# Altium PCB PCB12.PcbDoc
Units mm, origin at the board's own origin, x right, y up, seen from the top; angles counter-clockwise.
Board outline 36.2 x 38.61 mm, 2 copper layers (Top Layer, Bottom Layer); 10 components, 6 nets, 27 pads, 0 vias.
Unrouted connection lines stored in the file: 1.
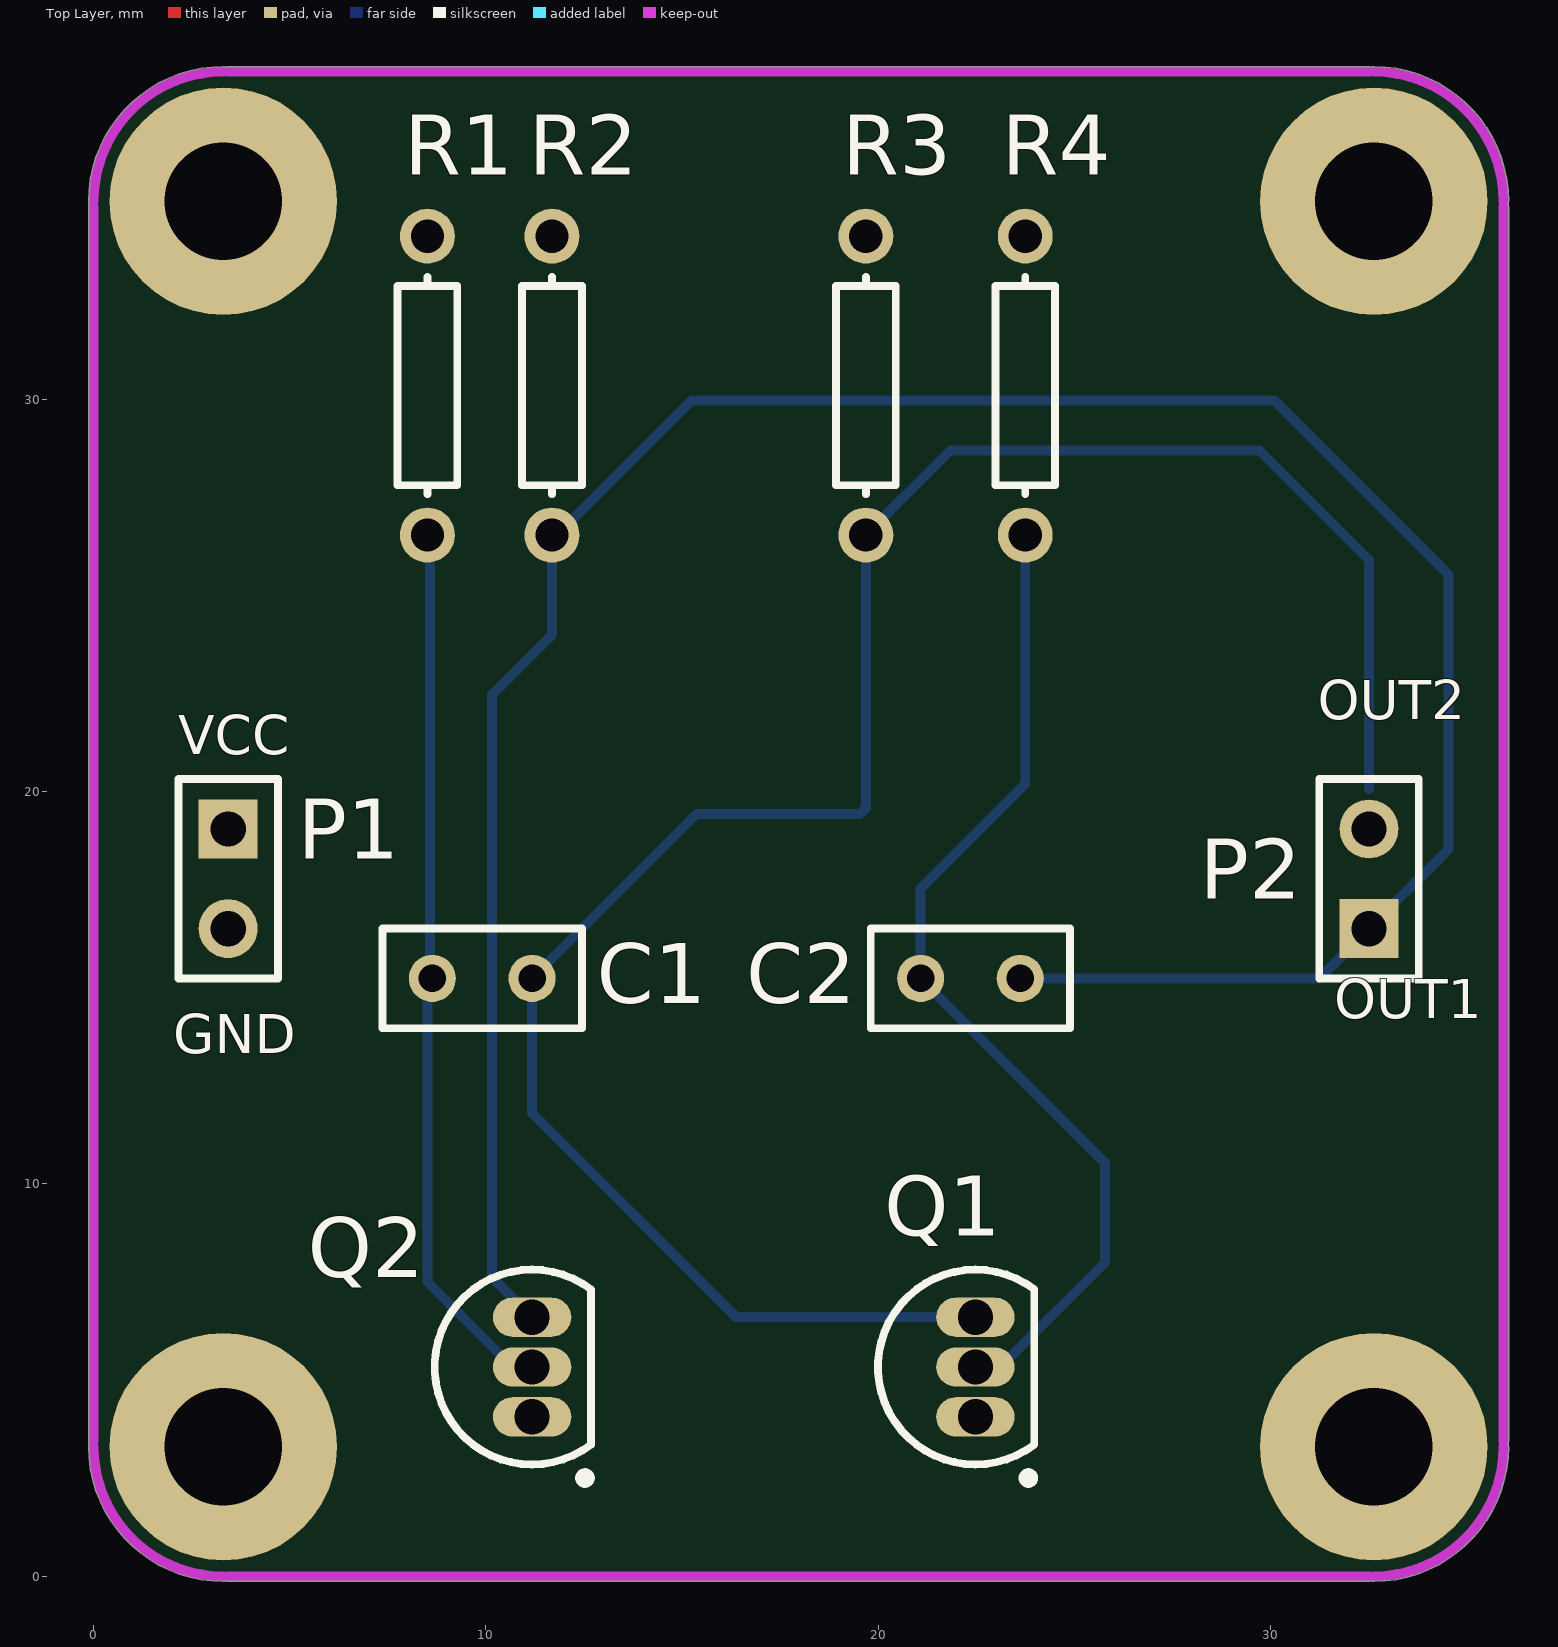
[diagram p0: Top Layer view]
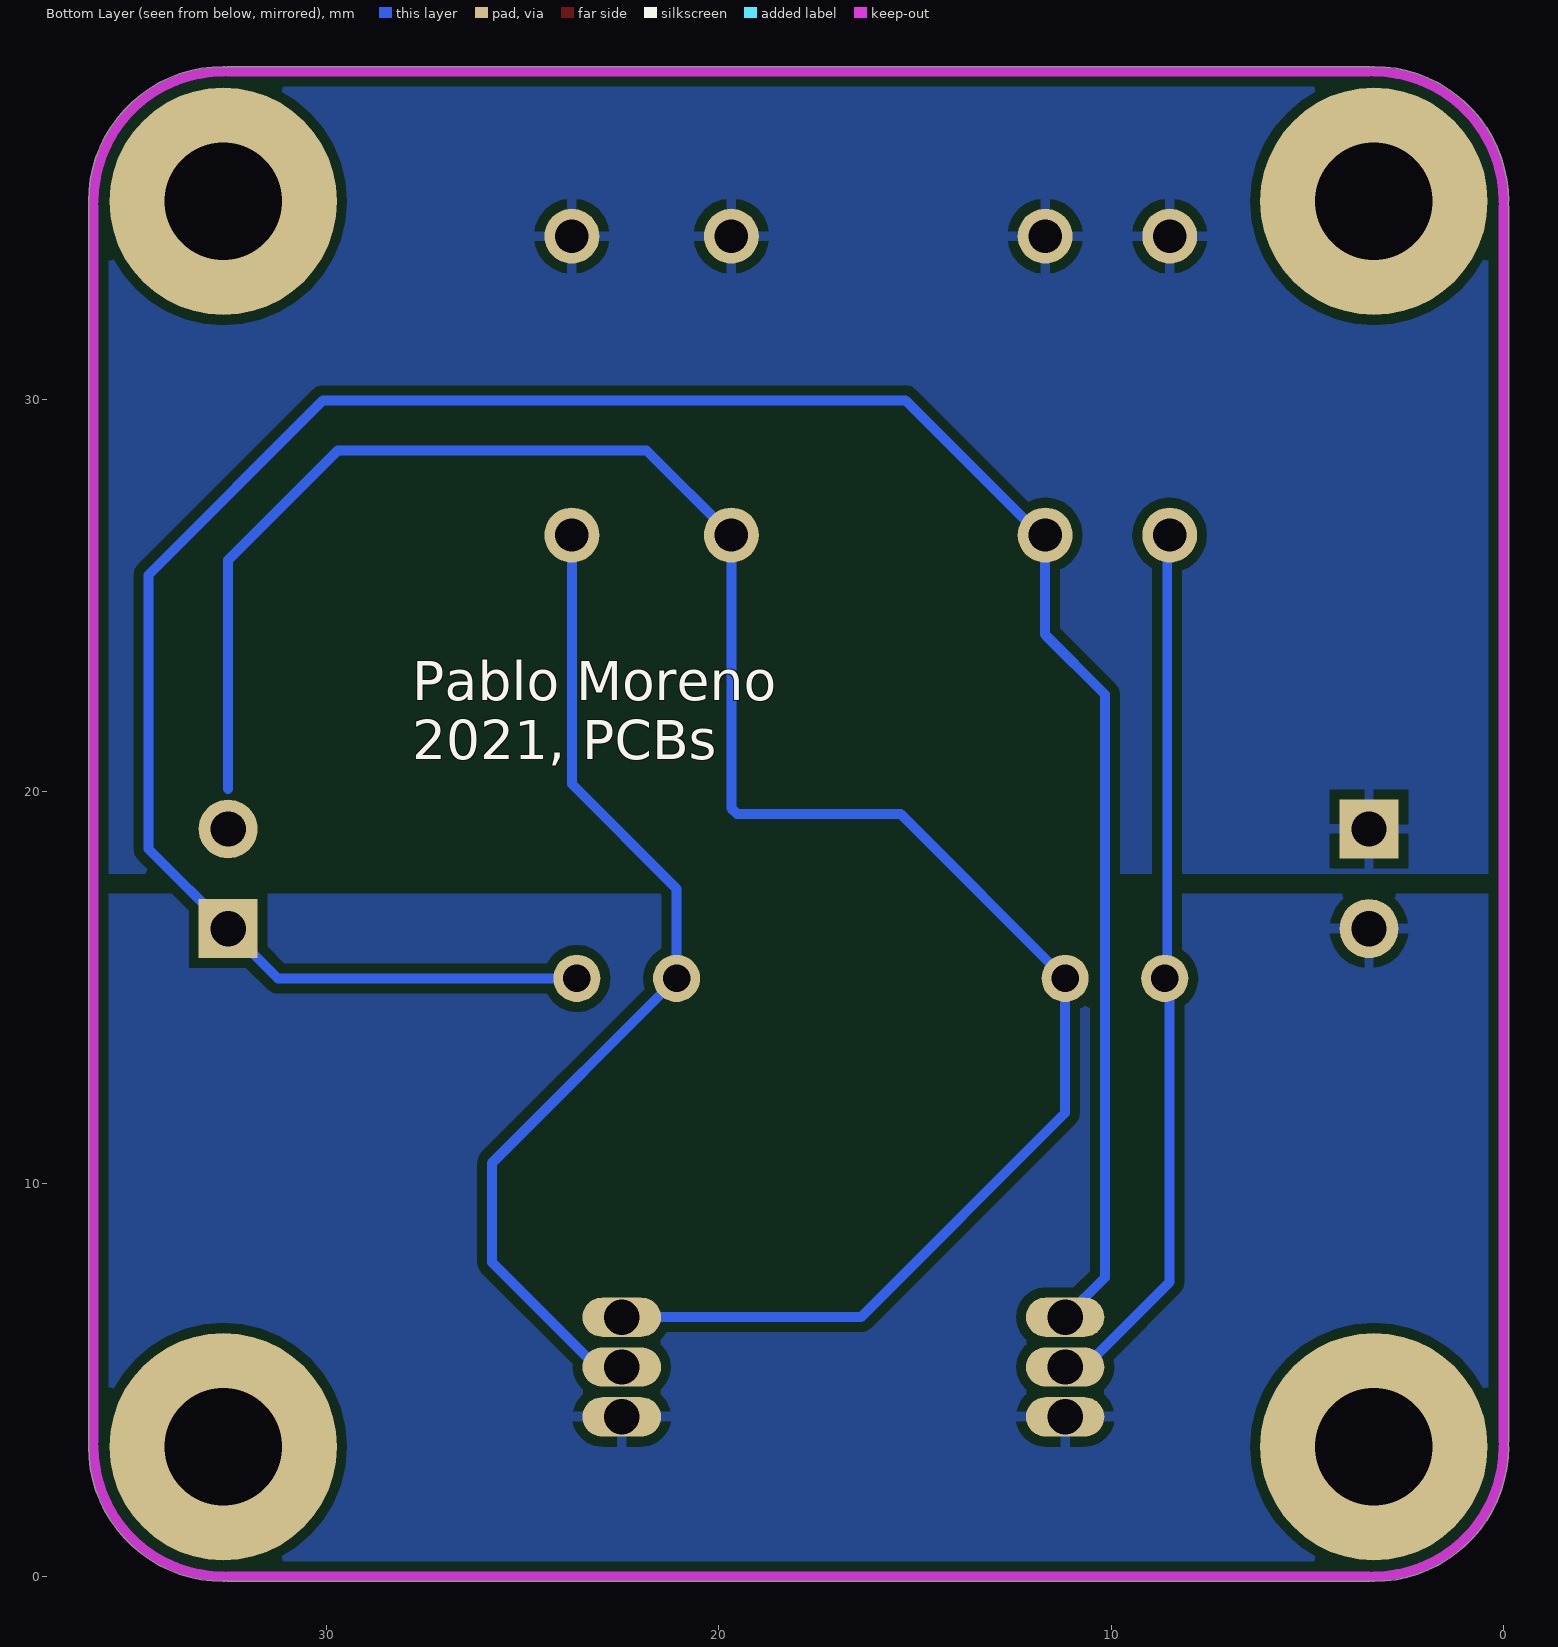
[diagram p1: Bottom Layer view, seen from below]
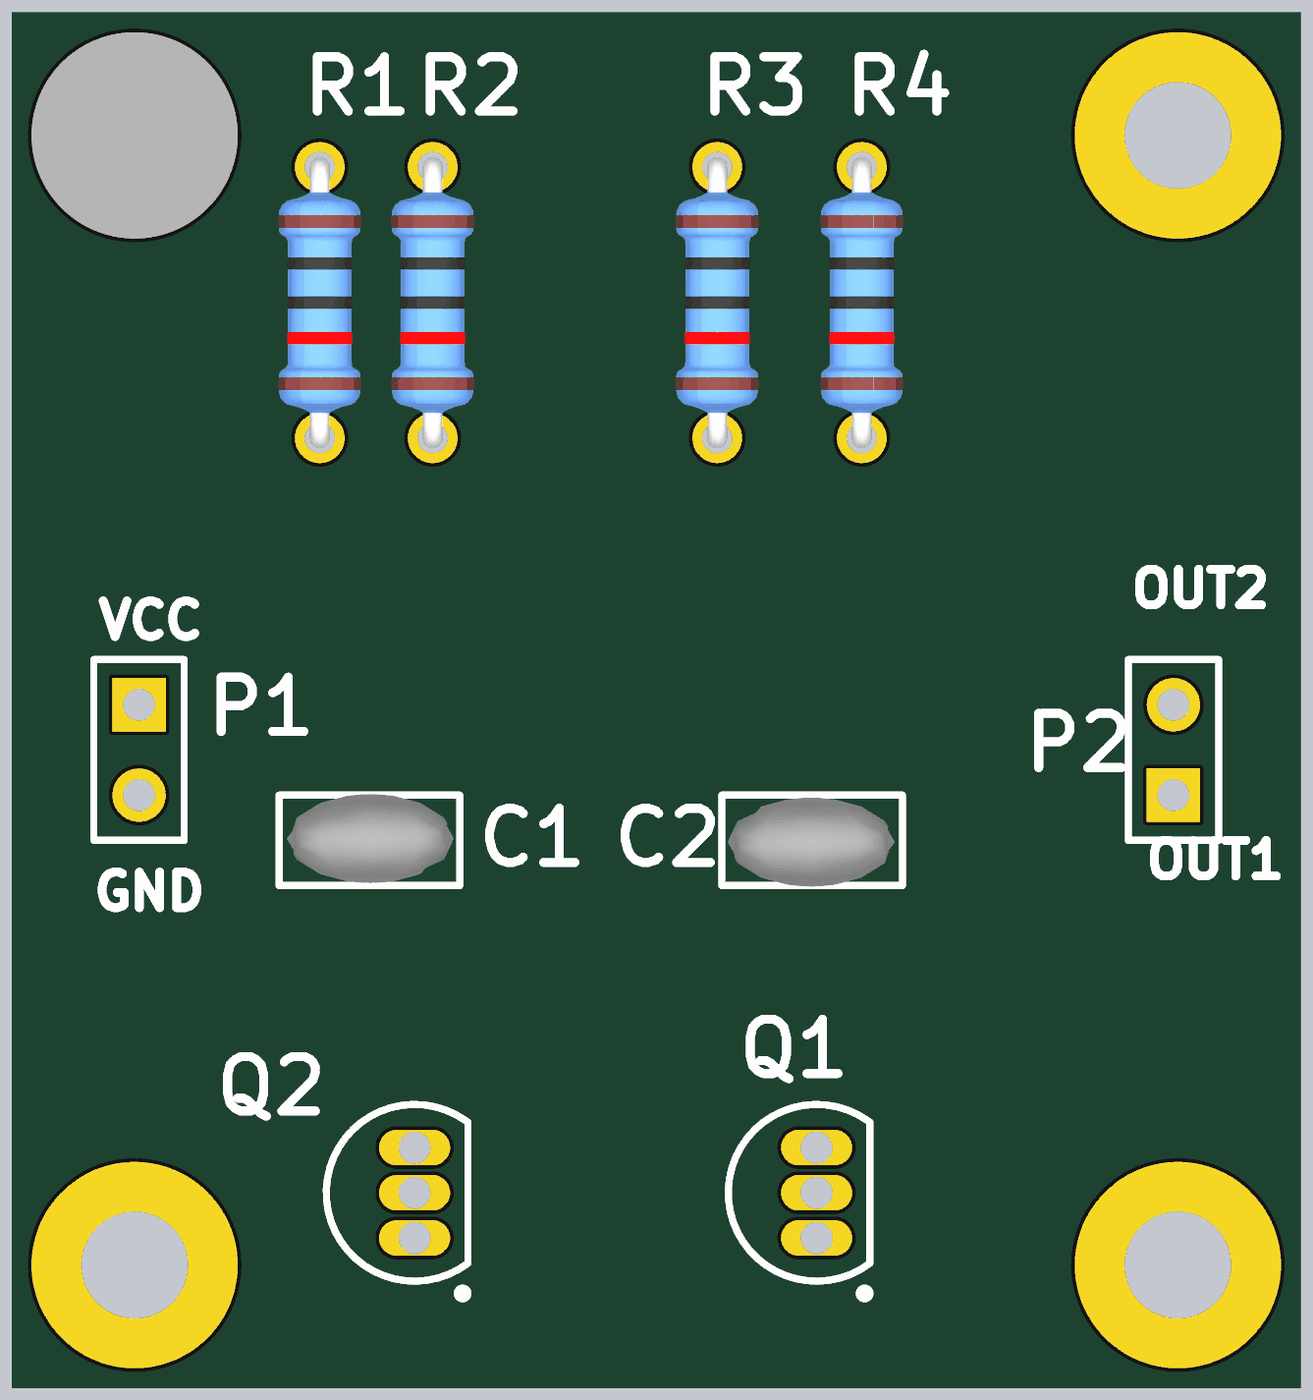
[diagram p2: 3D render of the assembled board from above, using the file's embedded part models]

## Layer stack, top to bottom
Top Solder: solder mask 0.0102, Solder Resist, Dk 3.5
Top Layer: signal copper 0.0356
Dielectric 1: dielectric 0.32, FR-4, Dk 4.8
Bottom Layer: signal copper 0.0356
Bottom Solder: solder mask 0.0102, Solder Resist, Dk 3.5

## Board outline
-0.127,3.302 cw(c0,3.302) -0.11,3.365 cw(c0,3.429) -0.127,3.429 -0.127,34.925 cw(c0,34.925) -0.11,34.989 cw(c0,35.052) -0.127,35.052 cw(c3.304,35.052) 3.304,38.484 cw(c3.304,38.356) 3.369,38.466 cw(c3.429,38.354) 3.429,38.481 32.512,38.481 cw(c32.512,38.354) 32.572,38.466 cw(c32.637,38.356) 32.637,38.484 cw(c32.637,35.052) 36.068,35.052 cw(c35.941,35.052) 36.051,34.989 cw(c35.941,34.925) 36.068,34.925 36.068,3.429 cw(c35.941,3.429) 36.051,3.365 cw(c35.941,3.302) 36.068,3.302 cw(c32.637,3.302) 32.637,-0.13 cw(c32.637,-0.002) 32.572,-0.112 cw(c32.512,0) 32.512,-0.127 3.429,-0.127 cw(c3.429,0) 3.369,-0.112 cw(c3.304,-0.002) 3.304,-0.13 cw(c3.304,3.302)

## Design rules (kind name [scope] priority, off if disabled: settings)
Clearance [All] p1: gap=0.254 ignorepadtopadclearanceinfootprint=FALSE except(0: Arc-Hole Track-Hole SMDPad-Hole THPad-Hole Via-Hole Fill-Hole Poly-Hole Region-Hole Text-Hole)
PolygonConnect [All] p1: connectstyle=Relief reliefconductorwidth=0.254 reliefentries=4 polygonreliefangle="90 Angle" airgapwidth=0.254
RoutingVias [All] p1: holewidth=0.711 width=1.27 viastyle="Through Hole" minholewidth=0.711 minwidth=1.27 maxholewidth=0.711 maxwidth=1.27
SolderMaskExpansion [All] p1: expansion=0.102
Width [All] p1: maxlimit=0.254 minlimit=0.254 preferedwidth=0.254
30 further rules are at their usual default settings.

## Classes and differential pairs
component class PrimerPCB12: C2 P1 P2 Q1 Q2 R1 R2 R3 R4

## Components (designator, comment, footprint, x,y, rotation, side; value= is the part's Value field where it differs from the comment)
C1 "Cap" RAD-0.1 9.906,15.24 r0 top value=20nF
C2 "Cap" RAD-0.1 22.352,15.24 r180 top value=20nF
P1 "Header 2" HDR1X2 3.429,19.05 r270 top
P2 "Header 2" HDR1X2 32.512,16.51 r90 top
Q1 "2N3904" TO-92A 22.479,5.334 r0 top
Q2 "2N3904" TO-92A 11.176,5.334 r0 top
R1 "Res1" AXIAL-0.3 8.509,30.353 r90 top value=100K
R2 "Res1" AXIAL-0.3 11.684,30.353 r90 top value=1K
R3 "Res1" AXIAL-0.3 19.685,30.353 r90 top value=1K
R4 "Res1" AXIAL-0.3 23.749,30.353 r90 top value=100K

## Footprints (in the part's own frame and the unit in brackets; to place one, negate y for a bottom-side part, rotate by r counter-clockwise, add the part's x,y. Pads: shape width x height; smd on the part's side, far side on the other; paste and mask are expansions set on the pad)
AXIAL-0.3 [mm] "Axial Device, Thru-Hole; 2 Leads; 0.3 in Pin Spacing"
  round 1.4 hole 0.85: 1(-3.81,0) 2(3.81,0)
  silkscreen extent -2.77,-0.76 2.77,0.76, body extent -4.08,-2.79 4.08,1.17, height 2.47
HDR1X2 [mm] "Connector; Header; 2 Position"
  rect 1.5x1.5 hole 0.9: 1(0,0)
  round 1.5 hole 0.9: 2(2.54,0)
  silkscreen extent -1.27,-1.27 3.81,1.27
RAD-0.1 [mm] "Radial Cap, Thru-Hole; 2 Leads; 0.1 in Pin Spacing"
  round 1.2 hole 0.7: 1(-1.27,0) 2(1.27,0)
  silkscreen extent -2.54,-1.27 2.54,1.27, body extent -2.32,-1.2 2.38,1.3, height 6.65
TO-92A [mm] "TO, Flat Index; 3 In-Line, Axial Leads; Body Dia. 4.5mm; Leads 0.51 x 0.48 mm (max)"
  oval 2x1 hole 0.9: 1(0,-1.27) 2(0,0) 3(0,1.27)
  silkscreen extent -2.48,-2.95 1.5,2.48, body extent -2.48,-2.5 1.5,2.5, height 6.86

## Part data
C1 C2: "Capacitor", LatestRevisionDate=17-Jul-2002, LatestRevisionNote="Re-released for DXP Platform.", PackageDescription="Radial Cap, Thru-Hole; 2 Leads; 0.3 in Pin Spacing", PackageReference=RAD-0.3, Published=8-Jun-2000, Publisher="Altium Limited"
P1 P2: "Header, 2-Pin", LatestRevisionDate=17-Jul-2002, LatestRevisionNote="Re-released for DXP Platform.", Publisher="Altium Limited"
Q1 Q2: "NPN General Purpose Amplifier", ComponentLink1Description="Manufacturer Link", ComponentLink1URL=http://www.fairchildsemi.com/, ComponentLink2Description=Datasheet, ComponentLink2URL=http://www.fairchildsemi.com/ds/2N%2F2N3904.pdf, DatasheetVersion=1997, LatestRevisionDate=15-Jan-2003, LatestRevisionNote="PCB Footprint 'BCY-W3/D4.7' replaced", PackageDescription="TO, Flat Index; 3 In-Line, Axial Leads; Body Dia. 4.5mm; Leads 0.51 x 0.48 mm (max)", PackageReference=TO-92A, PackageVersion=Sep-1998, Published=8-Jun-2000, Publisher="Altium Limited"
R1 R2 R3 R4: "Resistor", LatestRevisionDate=17-Jul-2002, LatestRevisionNote="Re-released for DXP Platform.", PackageDescription="Axial Device, Thru-Hole; 2 Leads; 0.3 in Pin Spacing", PackageReference=AXIAL-0.3, Published=8-Jun-2000, Publisher="Altium Limited"

## Free pads (board coordinates)
  round 5.8 hole 3: 0(3.304,3.302) 0(3.304,35.052) 0(32.637,3.302) 0(32.637,35.052)
  round 5.8 smd: 0(3.304,35.052)

## Nets (pads, with @x,y where several pads share a name; then routed paths per layer and width w, separated by ;. In a path a pad name is that pad's centre, name@x,y a point inside that pad or via, vN(x,y) a via of type N, cw(c..) or ccw(c..) an arc to the next point about the centre after c; other vN are vias at no path point)
GND: P1.2 Q1.1 Q2.1
NetC1_1: C1.1 Q2.2 R1.1 | length 22.7
  Bottom Layer w0.254: R1.1 8.572,26.479 8.572,15.303 C1.1 8.509,15.113 8.509,7.501 10.676,5.334 Q2.2
NetC2_2: C2.2 Q1.2 R4.1 | length 26
  Bottom Layer w0.254: Q1.2 23.114,5.334 25.781,8.001 25.781,10.541 C2.2 21.082,17.526 23.749,20.193 R4.1
OUT1: C2.1 P2.1 Q2.3 R2.1 | length 66.4
  Bottom Layer w0.254: Q2.3 10.16,7.62 10.16,22.479 11.684,24.003 R2.1 11.811,26.543 15.24,29.972 30.099,29.972 34.544,25.527 34.544,18.542 P2.1 31.242,15.24 C2.1
OUT2: C1.2 P2.2 Q1.3 R3.1 | length 54.9
  Bottom Layer w0.254: Q1.3 16.383,6.604 11.176,11.811 C1.2 15.367,19.431 19.536,19.431 19.685,19.58 R3.1 21.844,28.702 29.718,28.702 32.512,25.908 32.512,20.066
VCC: P1.1 R1.2 R2.2 R3.2 R4.2

## Polygon pours and split planes (outlines as drawn)
no net on Bottom Overlay (solid): 3.556,37.719
GND on Bottom Layer "Bottom Layer-GND" (solid, remove dead copper, pour order 8): 0,17.399 35.941,17.399 35.941,3.429 32.512,0 3.683,0 0,3.683
VCC on Bottom Layer "Bottom Layer-VCC" (solid, remove dead copper, pour order 6): 0,17.907 35.941,17.907 35.941,34.544 32.131,38.354 3.556,38.354 0.127,34.925 0,34.925
no net on Bottom Layer "Bottom Layer-No Net" (solid, pour order 4): 0,17.399

## Keep-outs
Keep-Out Layer:
  lines w0.254: 0,3.302 ccw(c3.304,3.302) 3.304,-0.002 ; 0,3.429 0,34.925 ; 0,35.052 cw(c3.304,35.052) 3.304,38.356 ; 3.429,0 32.512,0 ; 3.429,38.354 32.512,38.354 ; 32.637,-0.002 ccw(c32.637,3.302) 35.941,3.302 ; 32.637,38.356 cw(c32.637,35.052) 35.941,35.052 ; 35.941,3.429 35.941,34.925

## Silkscreen, mask and mechanical layers (free items; w line width, h text height)
Top Overlay:
  text "OUT2" at 31.2,21.844 h1
  text "VCC" at 2.159,20.955 h1
  text "OUT1" at 31.621,14.224 h1
  text "GND" at 2.032,13.335 h1
Bottom Overlay:
  text "Pablo Moreno  / 2021, PCBs" at 27.813,20.828 h1